# EAGLE board RUDAS_KID_designBox (EAGLE 9.3.0)

Size 160 x 100 mm. Coordinates in mm from the lower left corner, seen from the top.
Outline: 0,0 160,0 160,100 0,100 0,0
Copper layers (1*16): Top 0.035mm / dielectric 1.5mm / Bottom 0.035mm
Design rules "default": minimum track width 6mil, minimum drill 0.35mm, track to track 6mil, track to pad 6mil, pad to pad 6mil, via to via 6mil, smd to smd 6mil, copper to edge 40mil, drill to drill 6mil, minimum pad ring 10mil, minimum via ring 8mil, stop-mask expansion 4mil, vias tented up to drill 0mil, thermal gap 10mil

## Footprints (pad centres in the part's own frame; a part is rotated, then mirrored left to right if it is on the bottom)
C2012 = smd 1.3 x 1.5: 1 -0.85,0; 2 0.85,0
LQFP144 = smd 0.4 x 1.5: 1 -8.8,-10.9; 36 8.8,-10.9; 73 8.8,10.9; 108 -8.8,10.9 | smd 0.3 x 1.5: 2 -8.25,-10.9; 3 -7.75,-10.9; 4 -7.25,-10.9; 5 -6.75,-10.9; 6 -6.25,-10.9; 7 -5.75,-10.9; 8 -5.25,-10.9; 9 -4.75,-10.9; 10 -4.25,-10.9; 11 -3.75,-10.9; 12 -3.25,-10.9; 13 -2.75,-10.9; 14 -2.25,-10.9; 15 -1.75,-10.9; 16 -1.25,-10.9; 17 -0.75,-10.9; 18 -0.25,-10.9; 19 0.25,-10.9; 20 0.75,-10.9; 21 1.25,-10.9; 22 1.75,-10.9; 23 2.25,-10.9; 24 2.75,-10.9; 25 3.25,-10.9; 26 3.75,-10.9; 27 4.25,-10.9; 28 4.75,-10.9; 29 5.25,-10.9; 30 5.75,-10.9; 31 6.25,-10.9; 32 6.75,-10.9; 33 7.25,-10.9; 34 7.75,-10.9; 35 8.25,-10.9; 74 8.25,10.9; 75 7.75,10.9; 76 7.25,10.9; 77 6.75,10.9; 78 6.25,10.9; 79 5.75,10.9; 80 5.25,10.9; 81 4.75,10.9; 82 4.25,10.9; 83 3.75,10.9; 84 3.25,10.9; 85 2.75,10.9; 86 2.25,10.9; 87 1.75,10.9; 88 1.25,10.9; 89 0.75,10.9; 90 0.25,10.9; 91 -0.25,10.9; 92 -0.75,10.9; 93 -1.25,10.9; 94 -1.75,10.9; 95 -2.25,10.9; 96 -2.75,10.9; 97 -3.25,10.9; 98 -3.75,10.9; 99 -4.25,10.9; 100 -4.75,10.9; 101 -5.25,10.9; 102 -5.75,10.9; 103 -6.25,10.9; 104 -6.75,10.9; 105 -7.25,10.9; 106 -7.75,10.9; 107 -8.25,10.9 | smd 1.5 x 0.4: 37 10.9,-8.8; 72 10.9,8.8; 109 -10.9,8.8; 144 -10.9,-8.8 | smd 1.5 x 0.3: 38 10.9,-8.25; 39 10.9,-7.75; 40 10.9,-7.25; 41 10.9,-6.75; 42 10.9,-6.25; 43 10.9,-5.75; 44 10.9,-5.25; 45 10.9,-4.75; 46 10.9,-4.25; 47 10.9,-3.75; 48 10.9,-3.25; 49 10.9,-2.75; 50 10.9,-2.25; 51 10.9,-1.75; 52 10.9,-1.25; 53 10.9,-0.75; 54 10.9,-0.25; 55 10.9,0.25; 56 10.9,0.75; 57 10.9,1.25; 58 10.9,1.75; 59 10.9,2.25; 60 10.9,2.75; 61 10.9,3.25; 62 10.9,3.75; 63 10.9,4.25; 64 10.9,4.75; 65 10.9,5.25; 66 10.9,5.75; 67 10.9,6.25; 68 10.9,6.75; 69 10.9,7.25; 70 10.9,7.75; 71 10.9,8.25; 110 -10.9,8.25; 111 -10.9,7.75; 112 -10.9,7.25; 113 -10.9,6.75; 114 -10.9,6.25; 115 -10.9,5.75; 116 -10.9,5.25; 117 -10.9,4.75; 118 -10.9,4.25; 119 -10.9,3.75; 120 -10.9,3.25; 121 -10.9,2.75; 122 -10.9,2.25; 123 -10.9,1.75; 124 -10.9,1.25; 125 -10.9,0.75; 126 -10.9,0.25; 127 -10.9,-0.25; 128 -10.9,-0.75; 129 -10.9,-1.25; 130 -10.9,-1.75; 131 -10.9,-2.25; 132 -10.9,-2.75; 133 -10.9,-3.25; 134 -10.9,-3.75; 135 -10.9,-4.25; 136 -10.9,-4.75; 137 -10.9,-5.25; 138 -10.9,-5.75; 139 -10.9,-6.25; 140 -10.9,-6.75; 141 -10.9,-7.25; 142 -10.9,-7.75; 143 -10.9,-8.25
TQFP100 = smd 1.5 x 0.3: 1 -8,6; 2 -8,5.5; 3 -8,5; 4 -8,4.5; 5 -8,4; 6 -8,3.5; 7 -8,3; 8 -8,2.5; 9 -8,2; 10 -8,1.5; 11 -8,1; 12 -8,0.5; 13 -8,0; 14 -8,-0.5; 15 -8,-1; 16 -8,-1.5; 17 -8,-2; 18 -8,-2.5; 19 -8,-3; 20 -8,-3.5; 21 -8,-4; 22 -8,-4.5; 23 -8,-5; 24 -8,-5.5; 25 -8,-6; 51 8,-6; 52 8,-5.5; 53 8,-5; 54 8,-4.5; 55 8,-4; 56 8,-3.5; 57 8,-3; 58 8,-2.5; 59 8,-2; 60 8,-1.5; 61 8,-1; 62 8,-0.5; 63 8,0; 64 8,0.5; 65 8,1; 66 8,1.5; 67 8,2; 68 8,2.5; 69 8,3; 70 8,3.5; 71 8,4; 72 8,4.5; 73 8,5; 74 8,5.5; 75 8,6 | smd 0.3 x 1.5: 26 -6,-8; 27 -5.5,-8; 28 -5,-8; 29 -4.5,-8; 30 -4,-8; 31 -3.5,-8; 32 -3,-8; 33 -2.5,-8; 34 -2,-8; 35 -1.5,-8; 36 -1,-8; 37 -0.5,-8; 38 0,-8; 39 0.5,-8; 40 1,-8; 41 1.5,-8; 42 2,-8; 43 2.5,-8; 44 3,-8; 45 3.5,-8; 46 4,-8; 47 4.5,-8; 48 5,-8; 49 5.5,-8; 50 6,-8; 76 6,8; 77 5.5,8; 78 5,8; 79 4.5,8; 80 4,8; 81 3.5,8; 82 3,8; 83 2.5,8; 84 2,8; 85 1.5,8; 86 1,8; 87 0.5,8; 88 0,8; 89 -0.5,8; 90 -1,8; 91 -1.5,8; 92 -2,8; 93 -2.5,8; 94 -3,8; 95 -3.5,8; 96 -4,8; 97 -4.5,8; 98 -5,8; 99 -5.5,8; 100 -6,8
686106183522 = smd 0.3 x 1: 1 -2.5,1.9; 2 -1.5,1.9; 3 -0.5,1.9; 4 0.5,1.9; 5 1.5,1.9; 6 2.5,1.9 | smd 1.65 x 1.3: Z1 -5.275,0; Z2 5.275,0
686108183422 = smd 0.3 x 1: 1 -3.5,1.9; 2 -2.5,1.9; 3 -1.5,1.9; 4 -0.5,1.9; 5 0.5,1.9; 6 1.5,1.9; 7 2.5,1.9; 8 3.5,1.9 | smd 1.65 x 1.3: Z1 -6.275,0; Z2 6.275,0
R2012 = smd 1.3 x 1.5: 1 -0.85,0; 2 0.85,0
TP_063 = drill 1.6 pad 2.54 octagon: TP 0,0
TQFP64 = smd 1 x 0.22: 1 -5.75,3.75; 2 -5.75,3.25; 3 -5.75,2.75; 4 -5.75,2.25; 5 -5.75,1.75; 6 -5.75,1.25; 7 -5.75,0.75; 8 -5.75,0.25; 9 -5.75,-0.25; 10 -5.75,-0.75; 11 -5.75,-1.25; 12 -5.75,-1.75; 13 -5.75,-2.25; 14 -5.75,-2.75; 15 -5.75,-3.25; 16 -5.75,-3.75; 33 5.75,-3.75; 34 5.75,-3.25; 35 5.75,-2.75; 36 5.75,-2.25; 37 5.75,-1.75; 38 5.75,-1.25; 39 5.75,-0.75; 40 5.75,-0.25; 41 5.75,0.25; 42 5.75,0.75; 43 5.75,1.25; 44 5.75,1.75; 45 5.75,2.25; 46 5.75,2.75; 47 5.75,3.25; 48 5.75,3.75 | smd 0.22 x 1: 17 -3.75,-5.75; 18 -3.25,-5.75; 19 -2.75,-5.75; 20 -2.25,-5.75; 21 -1.75,-5.75; 22 -1.25,-5.75; 23 -0.75,-5.75; 24 -0.25,-5.75; 25 0.25,-5.75; 26 0.75,-5.75; 27 1.25,-5.75; 28 1.75,-5.75; 29 2.25,-5.75; 30 2.75,-5.75; 31 3.25,-5.75; 32 3.75,-5.75; 49 3.75,5.75; 50 3.25,5.75; 51 2.75,5.75; 52 2.25,5.75; 53 1.75,5.75; 54 1.25,5.75; 55 0.75,5.75; 56 0.25,5.75; 57 -0.25,5.75; 58 -0.75,5.75; 59 -1.25,5.75; 60 -1.75,5.75; 61 -2.25,5.75; 62 -2.75,5.75; 63 -3.25,5.75; 64 -3.75,5.75
SOP8 = smd 0.6 x 1.6: 1 -1.905,-2.6; 2 -0.635,-2.6; 3 0.635,-2.6; 4 1.905,-2.6; 5 1.905,2.6; 6 0.635,2.6; 7 -0.635,2.6; 8 -1.905,2.6
M80-5305042 = drill 0.65: PIN1 0,-1; PIN2 2,-1; PIN3 4,-1; PIN4 6,-1; PIN5 8,-1; PIN6 10,-1; PIN7 12,-1; PIN8 14,-1; PIN9 16,-1; PIN10 18,-1; PIN11 20,-1; PIN12 22,-1; PIN13 24,-1; PIN14 26,-1; PIN15 28,-1; PIN16 30,-1; PIN17 32,-1; PIN18 34,-1; PIN19 36,-1; PIN20 38,-1; PIN21 40,-1; PIN22 42,-1; PIN23 44,-1; PIN24 46,-1; PIN25 48,-1; PIN26 0,1; PIN27 2,1; PIN28 4,1; PIN29 6,1; PIN30 8,1; PIN31 10,1; PIN32 12,1; PIN33 14,1; PIN34 16,1; PIN35 18,1; PIN36 20,1; PIN37 22,1; PIN38 24,1; PIN39 26,1; PIN40 28,1; PIN41 30,1; PIN42 32,1; PIN43 34,1; PIN44 36,1; PIN45 38,1; PIN46 40,1; PIN47 42,1; PIN48 44,1; PIN49 46,1; PIN50 48,1

## Placement (x,y rotation side)
C1  [C2012]  -30.48,71.12 0 top  (outside the outline)
C2  [C2012]  -35.56,71.12 0 top  (outside the outline)
C3  [C2012]  -40.64,71.12 0 top  (outside the outline)
C4  [C2012]  -45.72,71.12 0 top  (outside the outline)
C5  [C2012]  -50.8,71.12 0 top  (outside the outline)
C6  [C2012]  -55.88,71.12 0 top  (outside the outline)
C7  [C2012]  -60.96,71.12 0 top  (outside the outline)
C8  [C2012]  -66.04,71.12 0 top  (outside the outline)
C9  [C2012]  -71.12,71.12 0 top  (outside the outline)
C10  [C2012]  -62.23,59.69 0 top  (outside the outline)
C11  [C2012]  -40.64,66.04 0 top  (outside the outline)
C12  [C2012]  -67.31,59.69 0 top  (outside the outline)
C13  [C2012]  -72.39,59.69 0 top  (outside the outline)
C14  [C2012]  -15.24,66.04 0 top  (outside the outline)
C15  [C2012]  -20.32,66.04 0 top  (outside the outline)
C16  [C2012]  -25.4,66.04 0 top  (outside the outline)
C17  [C2012]  -30.48,66.04 0 top  (outside the outline)
C18  [C2012]  -35.56,66.04 0 top  (outside the outline)
IC2  STM32F103VGT6  [LQFP144]  -29.21,12.7 0 top  (outside the outline)
IC3  5M240ZT100  [TQFP100]  -50.8,11.43 0 top  (outside the outline)
J1  [686106183522]  -44.45,39.37 0 top  (outside the outline)
J2  [686108183422]  -30.48,39.37 0 top  (outside the outline)
R1  [R2012]  -45.72,66.04 0 top  (outside the outline)
R2  [R2012]  -50.8,66.04 0 top  (outside the outline)
R3  [R2012]  -55.88,66.04 0 top  (outside the outline)
R4  [R2012]  -60.96,66.04 0 top  (outside the outline)
R5  [R2012]  -66.04,66.04 0 top  (outside the outline)
R6  [R2012]  -71.12,66.04 0 top  (outside the outline)
R7  [R2012]  -15.24,71.12 0 top  (outside the outline)
R8  [R2012]  -20.32,71.12 0 top  (outside the outline)
R9  [R2012]  -25.4,71.12 0 top  (outside the outline)
TP1  TP063  [TP_063]  -64.77,40.64 0 top  (outside the outline)
TP2  TP063  [TP_063]  -26.67,48.26 0 top  (outside the outline)
TP3  TP063  [TP_063]  -41.91,48.26 0 top  (outside the outline)
TP4  TP063  [TP_063]  -57.15,48.26 0 top  (outside the outline)
TP5  TP063  [TP_063]  -72.39,48.26 0 top  (outside the outline)
TP6  TP063  [TP_063]  -26.67,54.61 0 top  (outside the outline)
TP7  TP063  [TP_063]  -41.91,54.61 0 top  (outside the outline)
TP8  TP063  [TP_063]  -57.15,54.61 0 top  (outside the outline)
TP9  TP063  [TP_063]  -72.39,54.61 0 top  (outside the outline)
TP10  TP063  [TP_063]  -26.67,60.96 0 top  (outside the outline)
TP11  TP063  [TP_063]  -41.91,60.96 0 top  (outside the outline)
TP12  TP063  [TP_063]  -57.15,60.96 0 top  (outside the outline)
U$1  IDT71V30  [TQFP64]  -66.04,8.89 0 top  (outside the outline)
U$2  ISO1050  [SOP8]  -17.78,40.64 0 top  (outside the outline)
U$5  CARD_EDGE_50PINM80-5305042  [M80-5305042]  -67.31,34.29 0 top  (outside the outline)

## Library data of the parts
C1-C18 = rcl; SPICEPREFIX: C
IC2 = ORBIT-STM32F
IC3 = ORBiT-IC-CPLD-Intel-MAX_V
J1 J2 = Wurth_Elektronik_Electromechanic_FPC_Connectors_&_Flat_Flexible_Cable_rev18c
R1-R9 = rcl; SPICEPREFIX: R
TP1-TP12 = ORBiT-special
U$1 = ORBiT-IC-IDT-sram
U$2 = ORBiT-IC-CAN-DRIVER
U$5 = ORBIT-CON-HARWIN-101LOK

## Nets
3V_GND: U$5.PIN28
5V_GND: U$5.PIN2
12V_GND: U$5.PIN26
!BUSY!: IC3.77 U$1.60
!CE!: IC3.75 U$1.58
!INT!: IC3.76 U$1.61
!OE!: IC3.74 U$1.1
+3V: U$5.PIN3
+5V: U$5.PIN27
+12V: U$5.PIN1
A0: IC3.73 U$1.2
A1: IC3.72 U$1.3
A2: IC3.71 U$1.4
A3: IC3.70 U$1.5
A4: IC3.69 U$1.6
A5: IC3.68 U$1.7
A6: IC3.67 U$1.8
A7: IC3.66 U$1.10
A8: IC3.64 U$1.11
A9: IC3.62 U$1.12
BOOT: IC2.138
C_TCK: IC3.24 J1.5 R9.2
C_TDI: IC3.23 J1.2 R8.1
C_TDO: IC3.25 J1.4 R6.1
C_TMS: IC3.22 J1.3 R7.1
CAN_H: U$2.7
CAN_H_P: U$5.PIN4
CAN_H_S: U$5.PIN29
CAN_L: U$2.6
CAN_L_P: U$5.PIN5
CAN_L_S: U$5.PIN30
CPL_VCC_IO1: IC3.9 IC3.31 IC3.45
CPLD_GND: C3.2 C4.2 C5.2 C6.2 C7.2 C8.2 C9.2 C10.2 IC3.1 IC3.10 IC3.11 IC3.32 IC3.46 IC3.60 IC3.65 IC3.79 IC3.93 J1.1 R9.1
CPLD_IO_VCC: J1.6 R6.2 R7.2 R8.2
CPLD_VCC: C3.1 C4.1 C5.1 C6.1 C7.1 C8.1 C9.1 C10.1
CPLD_VCC_CORE: IC3.13 IC3.63
CPLD_VCC_IO2: IC3.59 IC3.80 IC3.94
D0: IC3.58 U$1.14
D1: IC3.57 U$1.15
D2: IC3.56 U$1.16
D3: IC3.55 U$1.17
D4: IC3.54 U$1.19
D5: IC3.53 U$1.20
D6: IC3.52 U$1.21
D7: IC3.51 U$1.22
FSMC_!NE1!: IC2.123 U$1.55
FSMC_!NOE!: IC2.118 U$1.48
FSMC_!NWAIT!: U$1.53
FSMC_!NWE!: IC2.119
FSMC_!WAIT!: IC2.122
FSMC_!WE!: U$1.54
FSMC_A0: IC2.10 U$1.47
FSMC_A1: IC2.11 U$1.46
FSMC_A2: IC2.12 U$1.45
FSMC_A3: IC2.13 U$1.44
FSMC_A4: IC2.14 U$1.43
FSMC_A5: IC2.15 U$1.42
FSMC_A6: IC2.50 U$1.41
FSMC_A7: IC2.53 U$1.39
FSMC_A8: IC2.54 U$1.38
FSMC_A9: IC2.55 U$1.37
FSMC_D0: IC2.85 U$1.26
FSMC_D1: IC2.86 U$1.27
FSMC_D2: IC2.114 U$1.28
FSMC_D3: IC2.115 U$1.29
FSMC_D4: IC2.58 U$1.31
FSMC_D5: IC2.59 U$1.32
FSMC_D6: IC2.60 U$1.33
FSMC_D7: IC2.63 U$1.34
GND2: U$2.5
IO_!INT!: U$1.52
LAN_CLK_N0: IC3.81 U$5.PIN9
LAN_CLK_N1: IC3.85 U$5.PIN15
LAN_CLK_N2: IC3.96 U$5.PIN21
LAN_CLK_N3: IC3.29 U$5.PIN34
LAN_CLK_N4: IC3.19 U$5.PIN40
LAN_CLK_N5: IC3.5 U$5.PIN46
LAN_CLK_P0: IC3.82 U$5.PIN10
LAN_CLK_P1: IC3.86 U$5.PIN16
LAN_CLK_P2: IC3.97 U$5.PIN22
LAN_CLK_P3: IC3.28 U$5.PIN35
LAN_CLK_P4: IC3.18 U$5.PIN41
LAN_CLK_P5: IC3.4 U$5.PIN47
LAN_N0: IC3.83 U$5.PIN11
LAN_N1: IC3.87 U$5.PIN17
LAN_N2: IC3.98 U$5.PIN23
LAN_N3: IC3.27 U$5.PIN36
LAN_N4: IC3.17 U$5.PIN42
LAN_N5: IC3.3 U$5.PIN48
LAN_P0: IC3.84 U$5.PIN12
LAN_P1: IC3.88 U$5.PIN18
LAN_P2: IC3.99 U$5.PIN24
LAN_P3: IC3.26 U$5.PIN37
LAN_P4: IC3.16 U$5.PIN43
LAN_P5: IC3.2 U$5.PIN49
N$1: C1.1 C2.1 U$1.56 U$1.57
N$2: C1.2 C2.2 U$1.24 U$1.25
NOTE0: U$5.PIN13
NOTE1: U$5.PIN19
NOTE2: U$5.PIN25
NOTE3: U$5.PIN38
NOTE4: U$5.PIN44
NOTE5: U$5.PIN50
R/!W!: IC3.78 U$1.59
S_GND: C11.2 C12.2 C13.2 C14.2 C15.2 C16.2 C17.2 C18.2 IC2.16 IC2.38 IC2.51 IC2.61 IC2.71 IC2.83 IC2.94 IC2.107 IC2.120 IC2.130 IC2.143 J2.1 R5.1 U$2.4
S_OSC_IN: IC2.23
S_OSC_OUT: IC2.24
S_RST: IC2.25 J2.2
S_TCK: IC2.109 J2.4 R5.2
S_TDI: IC2.110 J2.6 R2.1
S_TDO: IC2.133 J2.3 R4.1
S_TMS: IC2.105 J2.5 R3.1
S_TRST: IC2.134 J2.7 R1.1
S_VCC: C11.1 C12.1 C13.1 C14.1 C15.1 C16.1 C17.1 C18.1 IC2.17 IC2.39 IC2.52 IC2.62 IC2.72 IC2.84 IC2.95 IC2.108 IC2.121 IC2.131 IC2.144 J2.8 R1.2 R2.2 R3.2 R4.2 U$2.1
SIGNAL_GND: U$5.PIN8 U$5.PIN14 U$5.PIN20 U$5.PIN33 U$5.PIN39 U$5.PIN45
STM32_CAN_RX: IC2.103 TP7.TP U$2.2
STM32_CAN_TX: IC2.104 TP8.TP U$2.3
STM32_I2C1_SCL: IC2.136 TP9.TP
STM32_I2C1_SDA: IC2.137 TP10.TP
STM32_SPI1_CS: IC2.40 TP1.TP
STM32_SPI1_MISO: IC2.42 TP3.TP
STM32_SPI1_MOSI: IC2.43 TP4.TP
STM32_SPI1_SCK: IC2.41 TP2.TP
STM32_UART1_RX: IC2.102 TP6.TP
STM32_UART1_TX: IC2.101 TP5.TP
STM32_UART2_RX: IC2.36 TP12.TP
STM32_UART2_TX: IC2.35 TP11.TP
VCC2: U$2.8
VDDA: IC2.33
VSSA: IC2.30

## Tracks (layer width: path | path; a pad name or v marks a point on that pad's centre or on a via)
!BUSY!  (1 unrouted)
!CE!  (1 unrouted)
!INT!  (1 unrouted)
!OE!  (1 unrouted)
A0  (1 unrouted)
A1  (1 unrouted)
A2  (1 unrouted)
A3  (1 unrouted)
A4  (1 unrouted)
A5  (1 unrouted)
A6  (1 unrouted)
A7  (1 unrouted)
A8  (1 unrouted)
A9  (1 unrouted)
C_TCK  (2 unrouted)
C_TDI  (2 unrouted)
C_TDO  (2 unrouted)
C_TMS  (2 unrouted)
CPL_VCC_IO1  (2 unrouted)
CPLD_GND  (18 unrouted)
CPLD_IO_VCC  (3 unrouted)
CPLD_VCC  (7 unrouted)
CPLD_VCC_CORE  (1 unrouted)
CPLD_VCC_IO2  (2 unrouted)
D0  (1 unrouted)
D1  (1 unrouted)
D2  (1 unrouted)
D3  (1 unrouted)
D4  (1 unrouted)
D5  (1 unrouted)
D6  (1 unrouted)
D7  (1 unrouted)
FSMC_!NE1!  (1 unrouted)
FSMC_!NOE!  (1 unrouted)
FSMC_A0  (1 unrouted)
FSMC_A1  (1 unrouted)
FSMC_A2  (1 unrouted)
FSMC_A3  (1 unrouted)
FSMC_A4  (1 unrouted)
FSMC_A5  (1 unrouted)
FSMC_A6  (1 unrouted)
FSMC_A7  (1 unrouted)
FSMC_A8  (1 unrouted)
FSMC_A9  (1 unrouted)
FSMC_D0  (1 unrouted)
FSMC_D1  (1 unrouted)
FSMC_D2  (1 unrouted)
FSMC_D3  (1 unrouted)
FSMC_D4  (1 unrouted)
FSMC_D5  (1 unrouted)
FSMC_D6  (1 unrouted)
FSMC_D7  (1 unrouted)
LAN_CLK_N0  (1 unrouted)
LAN_CLK_N1  (1 unrouted)
LAN_CLK_N2  (1 unrouted)
LAN_CLK_N3  (1 unrouted)
LAN_CLK_N4  (1 unrouted)
LAN_CLK_N5  (1 unrouted)
LAN_CLK_P0  (1 unrouted)
LAN_CLK_P1  (1 unrouted)
LAN_CLK_P2  (1 unrouted)
LAN_CLK_P3  (1 unrouted)
LAN_CLK_P4  (1 unrouted)
LAN_CLK_P5  (1 unrouted)
LAN_N0  (1 unrouted)
LAN_N1  (1 unrouted)
LAN_N2  (1 unrouted)
LAN_N3  (1 unrouted)
LAN_N4  (1 unrouted)
LAN_N5  (1 unrouted)
LAN_P0  (1 unrouted)
LAN_P1  (1 unrouted)
LAN_P2  (1 unrouted)
LAN_P3  (1 unrouted)
LAN_P4  (1 unrouted)
LAN_P5  (1 unrouted)
N$1  (3 unrouted)
N$2  (3 unrouted)
R/!W!  (1 unrouted)
S_GND  (21 unrouted)
S_RST  (1 unrouted)
S_TCK  (2 unrouted)
S_TDI  (2 unrouted)
S_TDO  (2 unrouted)
S_TMS  (2 unrouted)
S_TRST  (2 unrouted)
S_VCC  (24 unrouted)
SIGNAL_GND  (5 unrouted)
STM32_CAN_RX  (2 unrouted)
STM32_CAN_TX  (2 unrouted)
STM32_I2C1_SCL  (1 unrouted)
STM32_I2C1_SDA  (1 unrouted)
STM32_SPI1_CS  (1 unrouted)
STM32_SPI1_MISO  (1 unrouted)
STM32_SPI1_MOSI  (1 unrouted)
STM32_SPI1_SCK  (1 unrouted)
STM32_UART1_RX  (1 unrouted)
STM32_UART1_TX  (1 unrouted)
STM32_UART2_RX  (1 unrouted)
STM32_UART2_TX  (1 unrouted)